# Altium PCB LimeSDR-Micro_mPCIe_1v4.PcbDoc (part 11 of 11)
Units mm, origin at the board's own origin, x right, y up, seen from the top; angles counter-clockwise.
Board outline 50.8 x 29.7 mm, 8 copper layers (Top, L2, L3, L4, L5, L6, L7, Bottom), stack 0.925 mm thick; 664 components, 386 nets, 2358 pads, 843 vias.
Unrouted connection lines stored in the file: 28.
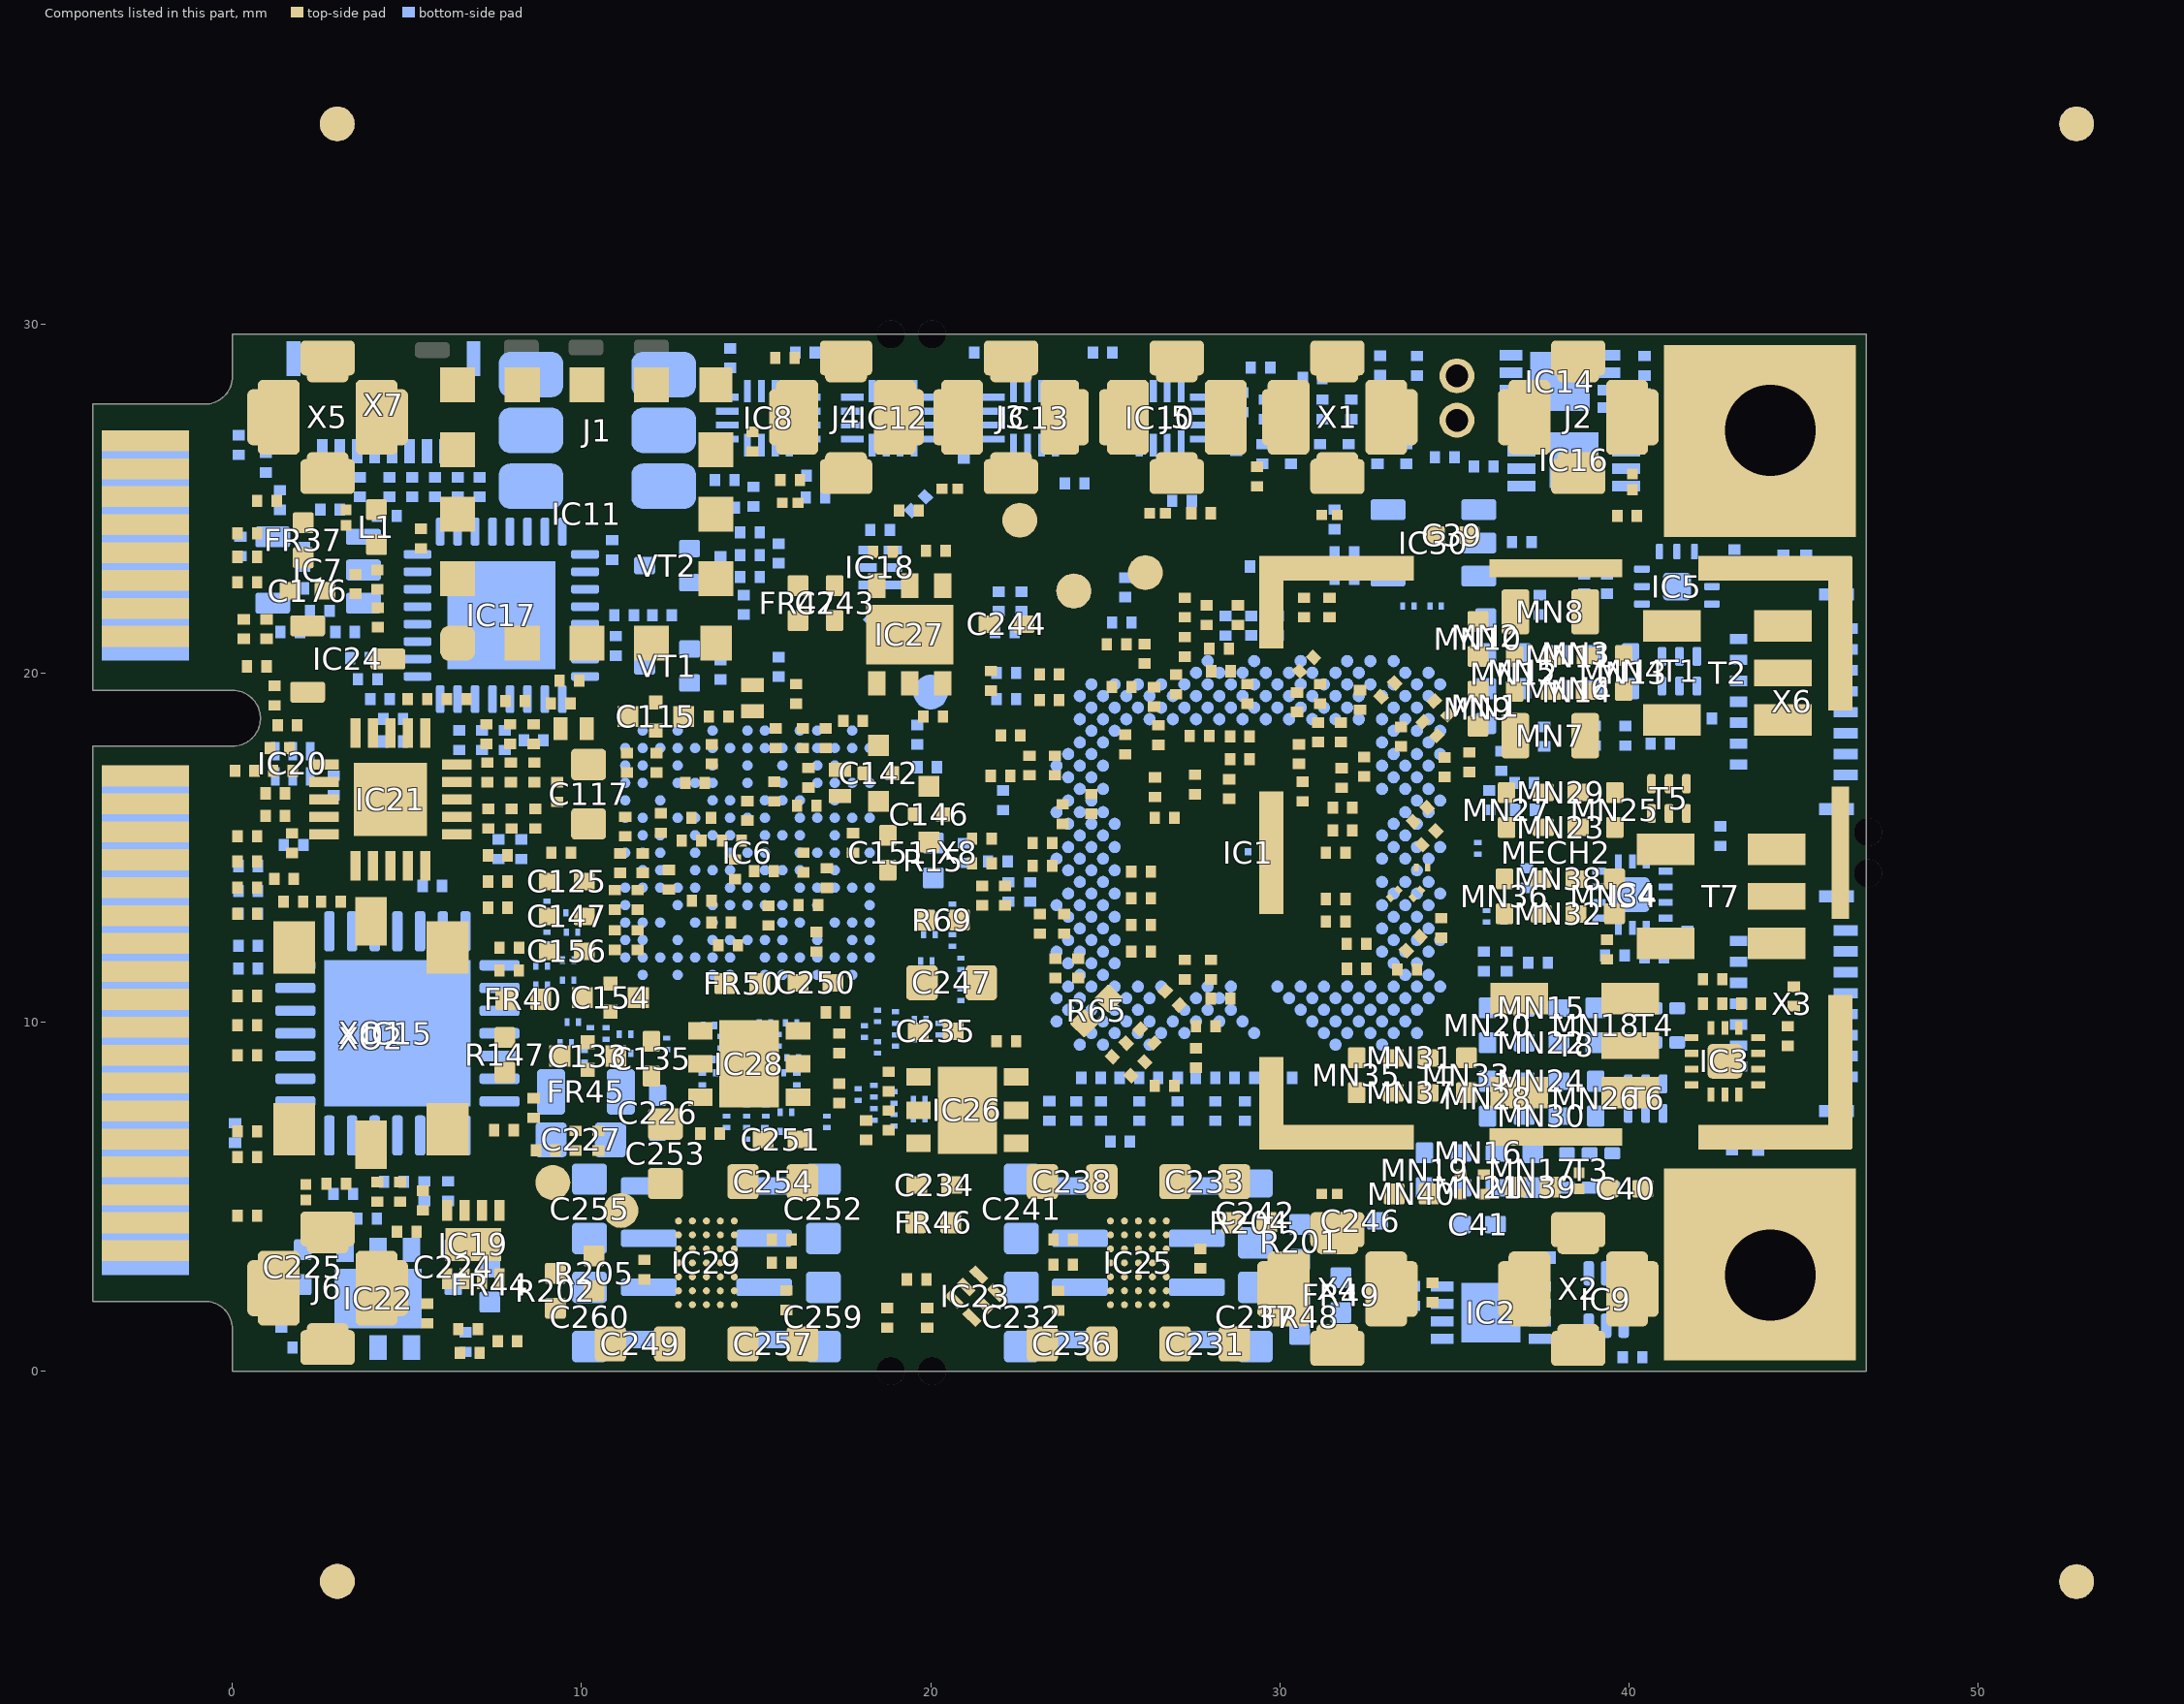
[diagram p15: the components of this part, seen from the top]

## Silkscreen, mask and mechanical layers (free items; w line width, h text height) (continued)
Mechanical1:
  drawing of 2583 lines, arcs and shapes, not listed
  text "LimeSDR-Micro mPCIe v.PROJECT_VERSION" at 207.475,288.32 h7
  text "CONTROLLED IMPEDANCE" at 67.575,274.82 h3
  text "STACKUP AND LAYER DESCRIPTION" at 196.575,274.82 h3
  text "GENERAL PARAMETERS" at 81.475,268.32 h1.7
  text "Parameter" at 103.475,264.545 h1.5
  text "Layer/Layers" at 148.975,264.32 h1.5
  text "Value" at 178.975,264.32 h1.5
  text "Top" at 143.975,259.52 h1.5
  text "17.5um" at 171.275,259.52 h1.5
  text "Copper foil thickness" at 68.475,259.32 h1.5
  text "102um (4 mils)" at 170.575,254.92 h1.5
  text "Dielectric thickness between layers" at 68.475,254.32 h1.5
  text "4.2" at 171.475,249.52 h1.5
  text "Dielectric permittivity between layers (Er)" at 68.475,249.32 h1.5
  text "Top-L2" at 143.975,248.32 h1.5
  text "Via type #2" at 288.35,247.275 h1.52
  text "Via type #1" at 318.25,247.25 h1.52
  text "17.5um" at 171.275,244.52 h1.5
  text "Copper foil thickness" at 68.475,244.32 h1.5
  text "Micro via" at 290.525,243.345 h1.52
  text "Bottom" at 143.975,243.32 h1.5
  text "Blind via" at 311.775,243.32 h1.52
  text "TH via" at 330.025,243.07 h1.52
  text "GERBER LAYER NAMES:" at 203.625,241.67 h1.52
  text "L7-Bot" at 292.475,240.27 h1.52
  text "L5-Bot" at 313.475,240.245 h1.52
  text "Top-Bot" at 329.475,239.995 h1.52
  text "102um (4 mils)" at 170.575,239.92 h1.5
  text "Dielectric thickness between layers" at 68.475,239.32 h1.5
  text "GTP" at 204.725,238.12 h1.52
  text "Top solder paste" at 209.825,237.77 h1
  text "GTO" at 204.725,235.045 h1.52
  text "Silkscreen" at 209.725,234.82 h1
  text "4.2" at 171.475,234.52 h1.5
  text "Dielectric permittivity between layers (Er)" at 68.475,234.32 h1.5
  text "ELECTRICAL LAYERS:" at 344.025,233.57 h1.52
  text "Bottom-L7" at 143.975,233.42 h1.5
  text "GTS" at 204.725,232.37 h1.52
  text "Soldermask (halogen free)" at 209.725,231.07 h1
  text "Top: RF/Signal/PWR/GND" at 344.7,230.095 h1.52
  text "GTL" at 204.725,229.87 h1.52
  text "0.5oz+plating" at 209.725,229.37 h1
  text "IT180A: 3313" at 258.187,227.22 h1.2
  text "4mil (102um)" at 240.887,227.195 h1
  text "PP" at 232.025,227.07 h1
  text "CALCULATIONS" at 67.475,226.82 h1.7
  text "G1" at 204.725,225.37 h1.52
  text "1oz (35um)" at 209.725,225.17 h1
  text "L2: GND" at 344.725,225.07 h1.52
  text "IT180A: 3313" at 258.175,222.72 h1.2
  text "4mil (102um)" at 240.875,222.695 h1
  text "CORE" at 232.025,222.57 h1
  text "Target impedance" at 74.475,221.82 h1.5
  text "Single-ended" at 143.975,221.82 h1.5
  text "50R" at 170.475,221.82 h1.5
  text "G2" at 204.725,220.87 h1.52
  text "1oz (35um)" at 209.725,220.67 h1
  text "L3: Signal/PWR/GND" at 344.725,220.57 h1.52
  text "IT180A: 2116" at 258.175,218.22 h1.2
  text "4.6mil (117um)" at 240.875,218.195 h1
  text "PP" at 232.025,218.07 h1
  text "Additional comments" at 74.475,216.82 h1.5
  text "Top layer, no side GND plane" at 143.975,216.82 h1.5
  text "G3" at 204.725,216.37 h1.52
  text "1oz (35um)" at 209.725,216.17 h1
  text "L4: Signal/PWR/GND" at 344.725,216.07 h1.52
  text "IT180A: 3313" at 258.175,213.72 h1.2
  text "4mil (102um)" at 240.875,213.695 h1
  text "CORE" at 232.025,213.57 h1
  text "G4" at 204.712,211.87 h1.52
  text "Top layer copper foil thickness" at 74.475,211.82 h1.5
  text "17.5um" at 143.975,211.82 h1.5
  text "1oz (35um)" at 209.725,211.67 h1
  text "1oz (35um)" at 209.712,211.645 h1
  text "L5: GND" at 344.825,211.57 h1.52
  text "IT180A: 2116" at 258.175,209.245 h1.2
  text "4.6mil (117um)" at 240.875,209.22 h1
  text "PP" at 232.012,209.07 h1
  text "G5" at 204.712,207.395 h1.52
  text "1oz (35um)" at 209.712,207.195 h1
  text "L6: CLK/PWR/GND" at 344.712,207.095 h1.52
  text "Track width" at 74.475,206.82 h1.5
  text "0.18mm" at 143.975,206.82 h1.5
  text "IT180A: 3313" at 258.162,204.745 h1.2
  text "4mil (102um)" at 240.862,204.72 h1
  text "CORE" at 232.012,204.595 h1
  text "G6" at 204.7,202.895 h1.52
  text "1oz (35um)" at 209.712,202.695 h1
  text "1oz (35um)" at 209.7,202.67 h1
  text "L7: GND" at 344.812,202.595 h1.52
  text ">3h" at 143.975,201.92 h1.5
  text "Distance to reference plane" at 74.475,201.82 h1.5
  text "IT180A: 3313" at 258.162,200.27 h1.2
  text "4mil (102um)" at 240.862,200.245 h1
  text "PP" at 232,200.095 h1
  text "102um (4 mils)" at 170.575,198.42 h1.5
  text "GBL" at 204.7,198.42 h1.52
  text "Bottom: RF/Signal/PWR/GND" at 344.75,198.395 h1.52
  text "0.5oz+plating" at 209.7,197.92 h1
  text "Dielectric thickness between layers" at 74.475,197.82 h1.5
  text "GBS" at 204.7,195.92 h1.52
  text "Soldermask (halogen free)" at 209.7,194.72 h1
  text "ADDITIONAL LAYERS:" at 347,194.12 h1.52
  text "GBO" at 204.7,193.32 h1.52
  text "Silkscreen" at 209.7,193.12 h1
  text "4.2" at 171.475,193.02 h1.5
  text "Dielectric permittivity between layers (Er)" at 74.475,191.82 h1.5
  text "Top-L2" at 143.975,191.82 h1.5
  text "GBP" at 204.7,190.345 h1.52
  text "Bottom solder paste" at 209.7,190.145 h1
  text "Mechanical 1: Board cutout" at 349.7,189.92 h1.52
  text "Total PCB thicknes: 1mm +/- 10%" at 228.3,187.62 h1.52
  text "50 Ohms (+/- 10% tolerance)" at 143.975,186.92 h1.5
  text "ASM TOP: Assembly top" at 349.7,186.92 h1.52
  text "RF (Top)" at 73.975,186.82 h2 r90
  text "Approximate microstrip line impedance" at 74.475,186.82 h1.5
  text "0.2mm drill / 0.35mm ring" at 311.075,185.275 h1.2
  text "0.2mm drill / 0.35mm ring" at 327.925,185.225 h1.2
  text "ASM BOT: Assembly bottom" at 349.7,183.92 h1.52
  text "TH via type must be resin filled with metal cap" at 276.75,182.025 h1.52
  text "Target impedance" at 74.475,181.82 h1.5
  text "Differential" at 143.975,181.82 h1.5
  text "100R" at 170.475,181.82 h1.5
  text "Mechanical 13: Component 3D body" at 349.7,180.92 h1.52
  text "Notes: Board shape and frame" at 349.775,177.995 h1.52
  text "Additional comments" at 74.475,176.82 h1.5
  text "Top layer, no side GND plane" at 143.975,176.82 h1.5
  text "Blind and micro via type can be coated with copper" at 276.85,176.05 h1.52
  text "Top layer copper foil thickness" at 74.475,171.82 h1.5
  text "17.5um" at 143.975,171.82 h1.5
  text "Track width" at 74.475,166.82 h1.5
  text "0.1 mm (3.93 mils)" at 143.975,166.82 h1.5
  text "Track spacing" at 74.475,161.82 h1.5
  text "0.1 mm (3.93 mils)" at 143.975,161.82 h1.5
  text ">3h" at 143.975,156.92 h1.5
  text "Distance to reference plane" at 74.475,156.82 h1.5
  text "102um (4 mils)" at 170.575,153.42 h1.5
  text "Dielectric thickness between layers" at 74.475,152.82 h1.5
  text "4.2" at 171.475,148.02 h1.5
  text "Dielectric permittivity between layers (Er)" at 74.475,146.82 h1.5
  text "Top-L2" at 143.975,146.82 h1.5
  text "100 Ohms (+/- 10% tolerance)" at 143.975,141.92 h1.5
  text "RF (Top)" at 73.975,141.82 h2 r90
  text "Approximate microstrip line impedance" at 74.475,141.82 h1.5
  text "Target impedance" at 74.475,136.82 h1.5
  text "Single-ended" at 143.975,136.82 h1.5
  text "50R" at 170.475,136.82 h1.5
  text "Additional comments" at 74.475,131.82 h1.5
  text "Bottom layer, no side GND plane" at 143.975,131.82 h1.5
  text "Top layer copper foil thickness" at 74.475,126.82 h1.5
  text "17.5 um" at 143.975,126.82 h1.5
  text "VERY IMPORTANT NOTES" at 196.575,123.62 h3
  text "Track width" at 74.475,121.82 h1.5
  text "0.18mm" at 143.975,121.82 h1.5
  text "GENERAL PCB SPECS" at 196.575,117.12 h1.7
  text "ADDITIONAL REQUIREMENTS" at 305.575,117.12 h1.7
  text ">3h" at 143.975,116.92 h1.5
  text "Distance to reference plane" at 74.475,116.82 h1.5
  text "102um (4 mils)" at 170.575,113.42 h1.5
  text "Dielectric thickness between layers" at 74.475,112.82 h1.5
  text "Minimum copper to copper spacing" at 197.475,112.12 h1.5
  text "0.1mm (3.9mil)" at 252.975,112.12 h1.5
  text "4.2" at 171.475,108.02 h1.5
  text "Minimum track width" at 197.475,107.12 h1.5
  text "0.1mm (3.9mil)" at 252.975,107.12 h1.5
  text "All 0.2mm vias including 0.35mm ring and 0.2mm drill via-in-pads (IC1 and IC7) must be resin filled with metal cap." at 310.425,107.12 h1.5
  text "Dielectric permittivity between layers (Er)" at 74.475,106.82 h1.5
  text "Bottom-L7" at 143.975,106.82 h1.5
  text "PCB thickness" at 197.475,102.12 h1.5
  text "1mm +/-10%" at 252.975,102.12 h1.5
  text "49.99 Ohms (+/- 10% tolerance)" at 143.975,101.92 h1.5
  text "RF (Bottom)" at 73.975,101.82 h2 r90
  text "Approximate microstrip line impedance" at 74.475,101.82 h1.5
  text "Target impedance" at 74.475,96.82 h1.5
  text "Differential" at 143.975,96.82 h1.5
  text "85R" at 170.475,96.82 h1.5
  text "PCB material" at 197.475,92.12 h1.5
  text "IT-180A preferred or equivalent RF-rated material (up to 3 GHz or higher)" at 253.975,92.02 h1.5
  text "Additional comments" at 74.475,91.82 h1.5
  text "Top/Bottom layers, no side GND" at 143.975,91.82 h1.5
  text "IC1 thermal pad vias with 0.4mm ring and 0.2mm drill must be resin filled with metal cap. IC1 thermal pad vias  with 0.5mm ring and 0.2mm drill must be left open (NO resin fill with metal cap). 4 vias in total, marked with note." at 310.425,91.12 h1.5
  text "External layer" at 252.975,87.12 h1.5
  text "0.5 oz+plating" at 279.575,87.12 h1.5
  text "Top layer copper foil thickness" at 74.475,86.82 h1.5
  text "17.5 um" at 143.975,86.82 h1.5
  text "Copper weight" at 197.475,82.32 h1.5
  text "Internal layer" at 252.975,82.12 h1.5
  text "1 oz" at 279.475,82.12 h1.5
  text "Track width" at 74.475,81.82 h1.5
  text "0.14 mm (5.5 mils)" at 143.975,81.82 h1.5
  text "DARK BLUE" at 252.975,77.12 h1.5
  text "Electrical test : 100 % netlist." at 310.425,77.12 h1.5
  text "Track spacing" at 74.475,76.82 h1.5
  text "0.1 mm (3.93 mils)" at 143.975,76.82 h1.5
  text "Both sides" at 252.975,72.12 h1.5
  text ">3h" at 143.975,71.92 h1.5
  text "Distance to reference plane" at 74.475,71.82 h1.5
  text "PCIe REQUIREMENTS #2 AND #3" at 9.375,68.7 h0.7
  text "PCI connector / edge chamfer" at -5.875,68.45 h0.7
  text "173um (6.8 mils)" at 170.575,68.42 h1.5
  text "Dielectric thickness between layers" at 74.475,67.82 h1.5
  text "Halogen free" at 252.975,67.12 h1.5
  text "Boards are to be individually bagged." at 310.425,67.12 h1.5
  text "4.2" at 171.475,63.02 h1.5
  text "Solder mask" at 197.475,62.12 h1.5
  text "Glossy finish (NOT matte)" at 252.975,62.12 h1.5
  text "Dielectric permittivity between layers (Er)" at 74.475,61.82 h1.5
  text "Top-L2 / Bottom-L7" at 143.975,61.82 h1.5
  text "45 (+/- 7) / degrees" at -10.55,59.525 h0.7
  text "White epoxy ink" at 252.975,57.12 h1.5
  text "PCB vendor to silkscreen UL and RoHS compliance marks, vendor logo and date code on bottom where shown (ignore if none of the info will be placed on PCB)" at 310.425,57.12 h1.5
  text "85 Ohms (+/- 10% tolerance)" at 143.975,56.92 h1.5
  text "PCIe (Top and Bottom)" at 73.975,56.82 h2 r90
  text "Approximate microstrip line impedance" at 74.475,56.82 h1.5
  text "0.25mm" at -10.424,54.775 h0.7
  text "Both sides" at 252.975,52.12 h1.5
  text "1mm +/- 0.1mm" at -5.925,50.725 h0.7
  text "PCIe REQUIREMENT #1" at -20.225,47.75 h0.7
  text "Halogen free" at 252.975,47.12 h1.5
  text "Assembly note: Assembly house MUST provide notes in paper with shipped board if there were any changes during assembly and the board is not assembled 100% according to BOM and P&P files. Note example:" at 310.425,44.12 h1.5
  text "Silkscreen" at 197.475,42.12 h1.5
  text "No silkscreen on pads" at 252.975,42.12 h1.5
  text "Comment" at 371.175,40.07 h1.5
  text "Part" at 311.775,38.82 h1.5
  text "Initial BOM asm. note" at 320.175,38.82 h1.5
  text "Current PCB status" at 338.175,38.82 h1.5
  text "Plated" at 252.975,37.12 h1.5
  text "Non-plated" at 279.475,37.12 h1.5
  text "R1" at 313.025,33.82 h1.5
  text "FIT" at 326.275,33.82 h1.5
  text "NF" at 344.525,33.82 h1.5
  text "Not mounted due to bad footprint" at 355.775,33.32 h1.5
  text "IC5" at 312.525,30.82 h1.5
  text "FIT" at 326.275,30.82 h1.5
  text "NF" at 344.525,30.32 h1.5
  text "Not mounted due to part shortage" at 355.775,29.82 h1.5
  text "Hole types on the PCB and information" at 197.475,27.12 h1.5
  text "Hole diameters are final manufactured diameters INCLUDING HOLE METALIZATION." at 257.175,27.12 h1.5
  text "V-score" at 253.725,22.12 h1.5
  text "Tab route" at 279.475,22.12 h1.5
  text "Route process" at 197.475,17.12 h1.5
  text "V-score and tab route" at 253.725,17.12 h1.5
  text "PCIe REQUIREMENT #1: PCI EXPRESS pads (top and bottom) - 30 micro inches of gold over 50 micro inches nickel plating" at 310.425,17.095 h1.5
  text "Panel" at 197.375,12.12 h1.5
  text "Yes" at 253.725,12.12 h1.5
  text "No" at 279.475,12.12 h1.5
  text "HASL lead free" at 253.725,7.12 h1.5
  text "PCIe REQUIREMENT #2: Board edge below PCI pads must be chamfered (as shown). Edges must be free of cutting burrs" at 310.425,7.095 h1.5
  text "HASL with lead" at 253.725,2.12 h1.5
  text "Immersion gold" at 253.725,-2.88 h1.5
  text "PCIe REQUIREMENT #3: PCIe finger leader lines are acceptable" at 310.425,-2.905 h1.5
  text "0.05-0.10um of gold over / 2.50-5.00um of nickel" at 275.125,-2.98 h1
  text "OSP" at 253.725,-7.88 h1.5
  text "Blind vias can be coated with copper" at 310.425,-12.905 h1.5
  text "PCIe fingers" at 270.5,-13.15 h1
  text "Surface finish (both sides)" at 197.275,-13.18 h1.5
  text "Hard gold" at 253.725,-13.18 h1.5
Notes:
  region: -4,19.5 -3.75,19.5 -3.75,27.7 -4,27.7
  region: -4,2 -3.75,2 -3.75,17.9 -4,17.9
  lines w0.15: -3.75,27.7 -4,27.7 ; -4,27.7 -0.8,27.7 ccw(c-0.8,28.5) 0,28.5 0,29.7 17.951,29.7 17.951,32.725 0,32.725 0,42.88 59.975,42.88 59.975,-13.18 0,-13.18 0,-3.025 17.951,-3.025 17.951,0 0,0 0,1.2 ccw(c-0.8,1.2) -0.8,2 -4,2 -4,17.9 0,17.9 ccw(c0,18.7) 0,19.5 -4,19.5 -4,27.7 ; 20.949,-3.025 49.825,-3.025 49.825,13.351 46.8,13.351 46.8,0 20.949,0 20.949,-3.025 ; 20.949,29.7 46.8,29.7 46.8,16.349 49.825,16.349 49.825,32.725 20.949,32.725 20.949,29.7
ASM BOT:
  region: -4,2 -3.75,2 -3.75,17.9 -4,17.9
  region: -4,19.5 -3.75,19.5 -3.75,27.7 -4,27.7
  lines w0.1: 9.075,9.7 9.75,10 ; 9.8,8.7 10.075,9 ; 10.25,9.675 10.46,10.14 ; 10.7,9.675 10.875,10.225 ; 13.5,11.175 13.925,10.35 ; 14.05,4.9 14.935,6.47 ; 14.95,11.125 15.55,10.35 ; 19,9.475 19.225,9.05 ; 19,10.125 19.05,10.575 ; 20.625,12.335 21.025,12.6 ; 20.65,13.215 21.025,13.475
  lines w0.15: -3.75,27.7 -4,27.7 ; 46.8,13.351 46.8,0 0,0 0,1.2 ccw(c-0.8,1.2) -0.8,2 -4,2 -4,17.9 0,17.9 ccw(c0,18.7) 0,19.5 -4,19.5 -4,27.7 ; 46.8,16.349 46.8,29.7 0,29.7 0,28.5 cw(c-0.8,28.5) -0.8,27.7 -4,27.7
  text "Assembly bottom" at 32.25,30.675 h1.25
ASM TOP:
  lines w0.1: 4.175,22.675 5.55,21.65 ; 28.88,17.528 29.574,16.824 ; 28.88,18.18 29.625,18.325 ; 32.975,20.2 33.122,19.515 ; 33.8,14.2 34.275,14.125 ; 38.575,5.45 38.575,6.5
  lines w0.15: -4,2 -4,17.9 0,17.9 ccw(c0,18.7) 0,19.5 -4,19.5 -4,27.7 -0.8,27.7 ccw(c-0.8,28.5) 0,28.5 0,29.7 46.8,29.7 46.8,0 0,0 0,1.2 ccw(c-0.8,1.2) -0.8,2 -4,2
  text "Assembly top" at 16.325,30.675 h1.25
  text "TP4" at 9.675,28.975 h0.3
  text "TP5" at 11.6,28.975 h0.3
  text "GND" at 2.275,28.775 h0.3
  text "GND" at 17.125,28.775 h0.3
  text "GND" at 21.85,28.775 h0.3
  text "GND" at 26.6,28.775 h0.3
  text "GND" at 31.2,28.775 h0.3
  text "GND" at 38.1,28.775 h0.3
  text "GND" at 0.9,27.2 h0.3
  text "GND" at 15.75,27.2 h0.3
  text "GND" at 20.475,27.2 h0.3
  text "GND" at 25.225,27.2 h0.3
  text "GND" at 29.825,27.2 h0.3
  text "GND" at 36.725,27.2 h0.3
  text "GND" at 3.825,27.175 h0.3
  text "GND" at 18.675,27.175 h0.3
  text "GND" at 23.4,27.175 h0.3
  text "GND" at 28.15,27.175 h0.3
  text "GND" at 32.75,27.175 h0.3
  text "GND" at 39.65,27.175 h0.3
  text "GND" at 0.9,2.25 h0.3
  text "GND" at 3.825,2.225 h0.3
  text "GND" at 29.825,2.225 h0.3
  text "GND" at 36.725,2.225 h0.3
  text "GND" at 32.75,2.2 h0.3
  text "GND" at 39.65,2.2 h0.3
  text "GND" at 2.225,0.625 h0.3
  text "GND" at 31.15,0.6 h0.3
  text "GND" at 38.05,0.6 h0.3

## Dimensions
-4,-16.454 to 59.975,-13.18 on Mechanical1
44.05,2.75 to 41.825,5.25 on Mechanical1
44.05,26.95 to 44.05,2.75 on Mechanical1
46.8,0 to 46.8,29.7 on Mechanical1
-4,2 to 46.8,0 on Mechanical1
59.975,42.88 to 59.975,-13.18 on Mechanical1
-3.75,27.7 to -4,27.7 on Mechanical1

## Text inside footprints (layer, text, board x,y; h text height)
D1: ASM TOP "C" at 9.275,18.275 h0.25; ASM TOP "A" at 10.075,18.325 h0.25
D2: ASM TOP "C" at 17.576,17.125 h0.25 r90; ASM TOP "A" at 17.576,16.325 h0.25 r90
D3: ASM TOP "C" at 14.925,19.7 h0.25 r90; ASM TOP "A" at 15.075,18.75 h0.25 r90
IC1: ASM BOT "Footprint revision: r5" at 31.75,10.9 h0.4; ASM BOT "Pad size = 0.35mm / Pad paste mask = 0.35mm / No AM2 pad" at 34.95,11.625 h0.4; ASM BOT "1) paste/pad ratio ~60% / 2) 4 thermal pad vias  / without metal cap / 3) all other thermal pad  / vias with metal cap" at 33.425,16.55 h0.4; Mechanical7 "0.2mm/0.5mm hole/ring vias under   / pad to be left open (no metal cap)" at 35.865,8.05 h0.35
IC6: ASM BOT "12" at 16.101,17.475 h0.3; ASM BOT "8" at 14.201,17.475 h0.3; ASM BOT "4" at 12.4,17.475 h0.3; ASM BOT "15" at 17.45,18.275 h0.3; ASM BOT "13" at 16.501,18.275 h0.3; ASM BOT "14" at 17.201,17.475 h0.3; ASM BOT "10" at 15.15,17.475 h0.3; ASM BOT "6" at 13.201,17.475 h0.3; ASM BOT "2" at 11.575,17.475 h0.3; ASM BOT "11" at 15.601,18.275 h0.3; ASM BOT "9" at 14.701,18.275 h0.3; ASM BOT "7" at 13.701,18.275 h0.3; ASM BOT "5" at 12.701,18.275 h0.3; ASM BOT "3" at 11.925,18.275 h0.3; ASM BOT "1" at 11.05,11.575 h0.3; ASM BOT "D" at 17.746,12.58 h0.3; ASM BOT "H" at 17.746,14.58 h0.3; ASM BOT "M" at 17.746,16.58 h0.3; ASM BOT "A" at 11.625,11.1 h0.3; ASM BOT "B" at 17.746,11.58 h0.3; ASM BOT "C" at 18.446,12.18 h0.3; ASM BOT "G" at 18.446,14.18 h0.3; ASM BOT "F" at 17.746,13.58 h0.3; ASM BOT "E" at 18.446,13.18 h0.3; ASM BOT "L" at 18.446,16.18 h0.3; ASM BOT "K" at 17.746,15.58 h0.3; ASM BOT "J" at 18.446,15.18 h0.3; ASM BOT "N" at 18.446,17.18 h0.3; ASM BOT "P" at 17.746,17.58 h0.3; ASM BOT "R" at 18.446,18.18 h0.3; BottomOverlay "R" at 10.05,17.2 h0.5; BottomOverlay "A" at 10.3,11.325 h0.5; BottomOverlay "1" at 10.975,10.125 h0.5 r270; BottomOverlay "15" at 18.899,19.475 h0.5
J2: ASM TOP "in" at 38.25,26.2 h0.3
J3: ASM TOP "in" at 22.1,26.225 h0.3
J4: ASM TOP "in" at 17.275,26.2 h0.3
J5: ASM TOP "in" at 26.75,26.2 h0.3
J6: ASM TOP "in" at 2.525,3.95 h0.3
JP1: ASM TOP "1" at 35.375,26.9 h0.3 r90; TopOverlay "1" at 34.975,25.675 h0.55; TopOverlay "2" at 35.55,29 h0.55
MECH1: ASM TOP "Shield Cover" at 39.975,22.475 h0.3
MECH2: ASM TOP "Shield Frame" at 42.5,24.25 h0.3
T2: Mechanical13 "NC" at 45.625,20.2 h0.2 r270; Mechanical13 "Sec" at 45.625,19 h0.2 r270; Mechanical13 "Sec*" at 45.625,21.7 h0.2 r270; Mechanical13 "Pri" at 39.825,18.9 h0.2 r270; Mechanical13 "Pri*" at 39.825,21.7 h0.2 r270
T7: Mechanical13 "Pri*" at 39.638,15.3 h0.2 r270; Mechanical13 "Pri" at 39.638,12.5 h0.2 r270; Mechanical13 "Sec*" at 45.438,15.3 h0.2 r270; Mechanical13 "Sec" at 45.438,12.6 h0.2 r270; Mechanical13 "NC" at 45.438,13.8 h0.2 r270
T8: Mechanical13 "NC" at 41.25,9.525 h0.2 r270; Mechanical13 "Sec" at 41.25,8.325 h0.2 r270; Mechanical13 "Sec*" at 41.25,11.025 h0.2 r270; Mechanical13 "Pri" at 35.45,8.225 h0.2 r270; Mechanical13 "Pri*" at 35.45,11.025 h0.2 r270
VT1: ASM BOT "S" at 13.15,19.6 h0.25; ASM BOT "D" at 11.85,20.1 h0.25; ASM BOT "G" at 13.15,20.6 h0.25
VT2: ASM BOT "S" at 13.15,22.475 h0.25; ASM BOT "D" at 11.85,22.975 h0.25; ASM BOT "G" at 13.15,23.475 h0.25
X1: ASM TOP "in" at 31.35,26.2 h0.3
X2: ASM TOP "in" at 38.05,3.775 h0.3
X3: ASM BOT "Connector input" at 46.175,7.725 h0.25 r270
X4: ASM TOP "in" at 31.15,3.775 h0.3
X5: ASM TOP "in" at 2.475,25.75 h0.3
X6: ASM BOT "Connector input" at 46.175,16.5 h0.25 r270